# Altium PCB MUX_Connectivity.PcbDoc
Units mil, origin at the board's own origin, x right, y up, seen from the top; angles counter-clockwise.
Board outline 5000 x 10500 mil, 2 copper layers (Top Layer, Bottom Layer); 65 components, 230 nets, 646 pads, 0 vias.
Unrouted connection lines stored in the file: 390.
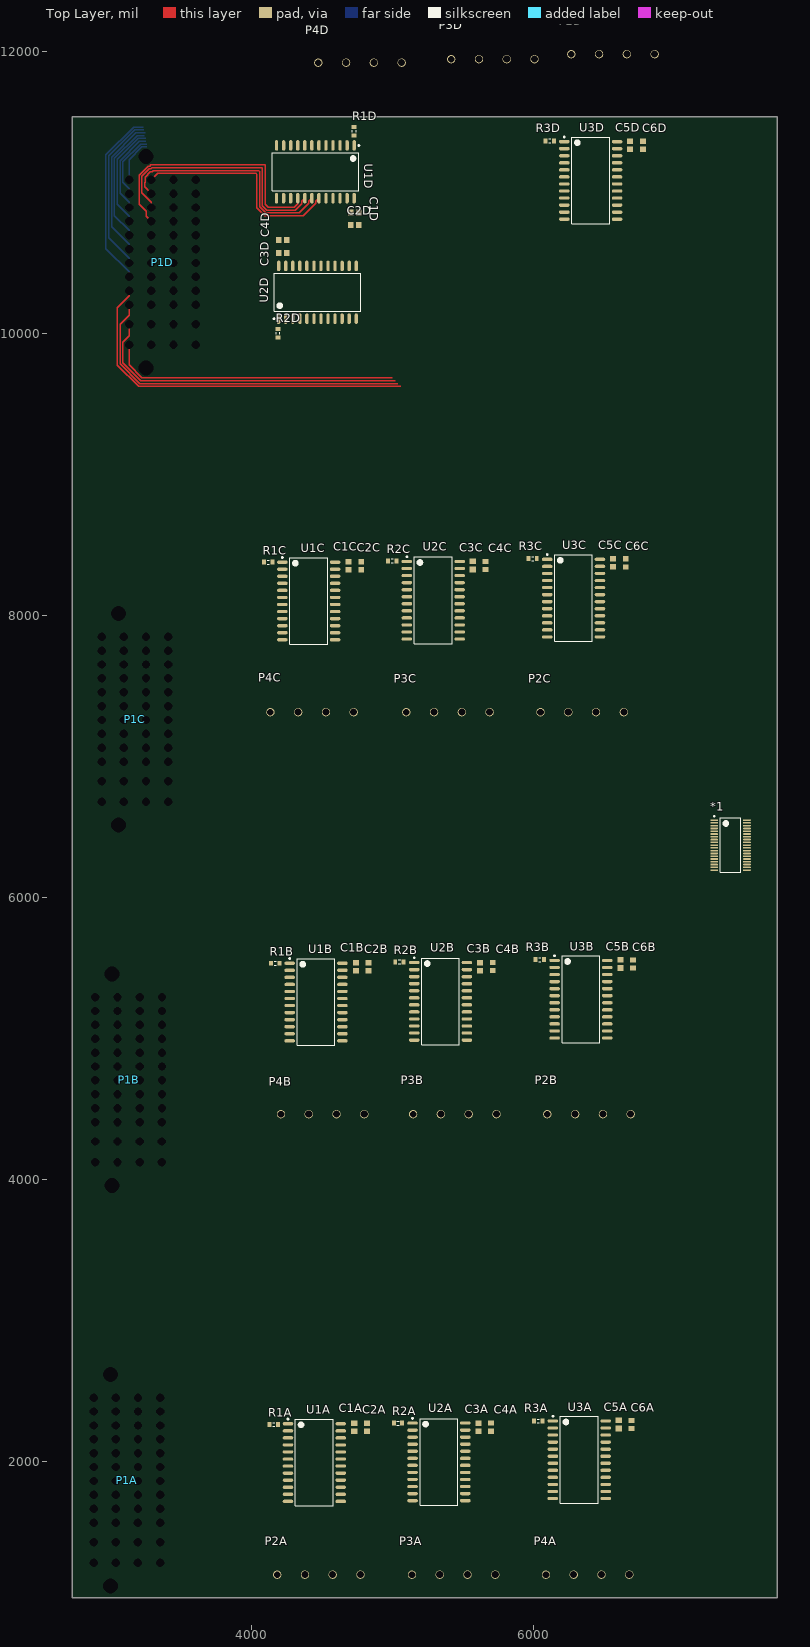
[diagram p0: Top Layer view]
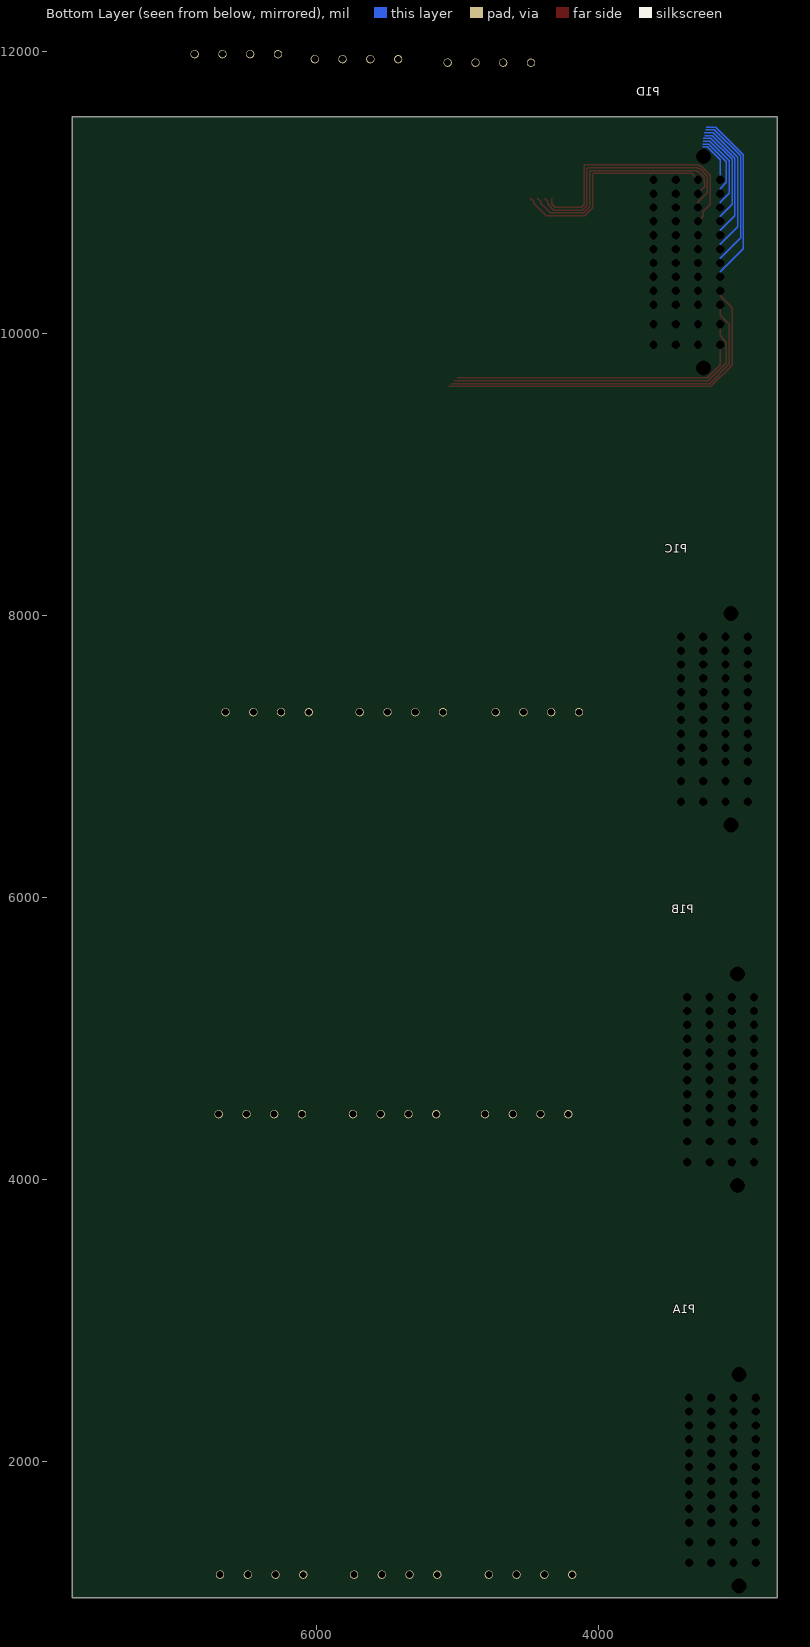
[diagram p1: Bottom Layer view, seen from below]

## Layer stack, top to bottom
Top Solder: solder mask 0.4, Solder Resist, Dk 3.5
Top Layer: signal copper 1.4
Dielectric 1: dielectric 12.6, FR-4, Dk 4.8
Bottom Layer: signal copper 1.4
Bottom Solder: solder mask 0.4, Solder Resist, Dk 3.5

## Board outline
2730,1035 2730,11535 7730,11535 7730,1035

## Design rules (kind name [scope] priority, off if disabled: settings)
Clearance [All] p1: gap=10 ignorepadtopadclearanceinfootprint=FALSE except(0: Arc-Hole Track-Hole SMDPad-Hole THPad-Hole Via-Hole Fill-Hole Poly-Hole Region-Hole Text-Hole)
ComponentClearance [All] p1: gap=10 collisioncheckmode=3 verticalgap=10 showdistances=TRUE
Height [All] p1: minheight=0 maxheight=7000 prefheight=500
PolygonConnect [All] p1: connectstyle=Relief reliefconductorwidth=10 reliefentries=4 polygonreliefangle="90 Angle" airgapwidth=10
RoomDefinition U_Single_Mux4 [InComponentClass('U_Single_Mux4')] p1: confinementstyle=ConfineIn formatcopy=TRUE lockcomponents=FALSE outline 4135.9,9895 7031.89,9895 7031.89,11505 4135.9,11505
RoomDefinition U_Single_Mux3 [InComponentClass('U_Single_Mux3')] p2: confinementstyle=ConfineIn formatcopy=TRUE lockcomponents=FALSE outline 4015,7103.54 6910.98,7103.54 6910.98,8458.54 4015,8458.54
RoomDefinition U_Single_Mux2 [InComponentClass('U_Single_Mux2')] p3: confinementstyle=ConfineIn formatcopy=TRUE lockcomponents=FALSE outline 4067.01,4260 6962.99,4260 6962.99,5615 4067.01,5615
RoomDefinition U_Single_Mux1 [InComponentClass('U_Single_Mux1')] p4: confinementstyle=ConfineIn formatcopy=TRUE lockcomponents=FALSE outline 4055,995 6950.98,995 6950.98,2350 4055,2350
RoomDefinition U_Data_Conversion [InComponentClass('U_Data_Conversion')] p5: confinementstyle=ConfineIn formatcopy=TRUE lockcomponents=FALSE outline 7180,6074.68 7660,6074.68 7660,6724.68 7180,6724.68
RoomDefinition U_AHK50H-ND_THERM_CONNECTOR4 [InComponentClass('U_AHK50H-ND_THERM_CONNECTOR4')] p6: confinementstyle=ConfineIn formatcopy=TRUE lockcomponents=FALSE outline 1449.88,11670.12 1449.88,9340.12 3774.88,9340.12 3774.88,11670.12
RoomDefinition U_AHK50H-ND_THERM_CONNECTOR3 [InComponentClass('U_AHK50H-ND_THERM_CONNECTOR3')] p7: confinementstyle=ConfineIn formatcopy=TRUE lockcomponents=FALSE outline 1215,8425 1215,6110 3540,6110 3540,8425
RoomDefinition U_AHK50H-ND_THERM_CONNECTOR2 [InComponentClass('U_AHK50H-ND_THERM_CONNECTOR2')] p8: confinementstyle=ConfineIn formatcopy=TRUE lockcomponents=FALSE outline 1210,5870 1210,3555 3535,3555 3535,5870
RoomDefinition U_AHK50H-ND_THERM_CONNECTOR1 [InComponentClass('U_AHK50H-ND_THERM_CONNECTOR1')] p9: confinementstyle=ConfineIn formatcopy=TRUE lockcomponents=FALSE outline 1195,3040 1195,675 3520,675 3520,3040
RoutingVias [All] p1: holewidth=28 width=50 viastyle="Through Hole" minholewidth=28 minwidth=50 maxholewidth=28 maxwidth=50
SolderMaskExpansion [All] p1: expansion=4
Width [All] p1: maxlimit=10 minlimit=10 preferedwidth=10
28 further rules are at their usual default settings.

## Classes and differential pairs
component class U_Data_Conversion: *1
channel class Single_Mux: U_Single_Mux1 U_Single_Mux2 U_Single_Mux3 U_Single_Mux4 U_Single_Mux5 U_Single_Mux6 U_Single_Mux7 U_Single_Mux8 U_Single_Mux9 U_Single_Mux10 U_Single_Mux11 U_Single_Mux12 U_Single_Mux13 U_Single_Mux14 U_Single_Mux15
component class U_Single_Mux4: C1D C2D C3D C4D C5D C6D P2D P3D P4D R1D R2D R3D U1D U2D U3D
component class U_Single_Mux3: C1C C2C C3C C4C C5C C6C P2C P3C P4C R1C R2C R3C U1C U2C U3C
component class U_Single_Mux2: C1B C2B C3B C4B C5B C6B P2B P3B P4B R1B R2B R3B U1B U2B U3B
component class U_Single_Mux1: C1A C2A C3A C4A C5A C6A P2A P3A P4A R1A R2A R3A U1A U2A U3A
component class U_AHK50H-ND_THERM_CONNECTOR1: P1A
component class U_AHK50H-ND_THERM_CONNECTOR2: P1B
component class U_AHK50H-ND_THERM_CONNECTOR3: P1C
channel class AHK50H-ND_THERM_CONNECTOR: U_AHK50H-ND_THERM_CONNECTOR1 U_AHK50H-ND_THERM_CONNECTOR2 U_AHK50H-ND_THERM_CONNECTOR3 U_AHK50H-ND_THERM_CONNECTOR4
channel class TOP_SHEET: top_Sheet1 top_Sheet2 top_Sheet3 top_Sheet4
net class ADC_OUTA[1..4]: ADC_OUTA1 ADC_OUTA2 ADC_OUTA3 ADC_OUTA4
net class ADC_OUTB[1..4]: ADC_OUTB1 ADC_OUTB2 ADC_OUTB3 ADC_OUTB4
net class ADC_OUTC[1..4]: ADC_OUTC1 ADC_OUTC2 ADC_OUTC3 ADC_OUTC4

## Components (designator, comment, footprint, x,y, rotation, side; value= is the part's Value field where it differs from the comment)
*1 "ADS7952SDBT" TSSOP50P640X120-38N 7398.86,6372.52 r0 top
C1A "0.1uF Cap" 0.1uF_Kemet 4730.98,2245 r90 top (schematic designator C1)
C1B "0.1uF Cap" 0.1uF_Kemet 4742.99,5510 r90 top (schematic designator C1)
C1C "0.1uF Cap" 0.1uF_Kemet 4690.98,8353.54 r90 top (schematic designator C1)
C1D "0.1uF Cap" 0.1uF_Kemet 4735.12,10858.11 r0 top (schematic designator C1)
C2A "1uF Samsung Cap" 1uf_Samsung 4820.98,2245 r90 top (schematic designator C2)
C2B "1uF Samsung Cap" 1uf_Samsung 4832.99,5510 r90 top (schematic designator C2)
C2C "1uF Samsung Cap" 1uf_Samsung 4780.98,8353.54 r90 top (schematic designator C2)
C2D "1uF Samsung Cap" 1uf_Samsung 4735.12,10768.11 r0 top (schematic designator C2)
C3A "0.1uF Cap" 0.1uF_Kemet 5610.98,2246.46 r90 top (schematic designator C3)
C3B "0.1uF Cap" 0.1uF_Kemet 5622.99,5511.46 r90 top (schematic designator C3)
C3C "0.1uF Cap" 0.1uF_Kemet 5570.98,8355 r90 top (schematic designator C3)
C3D "0.1uF Cap" 0.1uF_Kemet 4223.42,10571.89 r180 top (schematic designator C3)
C4A "1uF Samsung Cap" 1uf_Samsung 5700.98,2246.46 r90 top (schematic designator C4)
C4B "1uF Samsung Cap" 1uf_Samsung 5712.99,5511.46 r90 top (schematic designator C4)
C4C "1uF Samsung Cap" 1uf_Samsung 5660.98,8355 r90 top (schematic designator C4)
C4D "1uF Samsung Cap" 1uf_Samsung 4223.42,10661.89 r180 top (schematic designator C4)
C5A "0.1uF Cap" 0.1uF_Kemet 6605.98,2265 r90 top (schematic designator C5)
C5B "0.1uF Cap" 0.1uF_Kemet 6617.99,5530 r90 top (schematic designator C5)
C5C "0.1uF Cap" 0.1uF_Kemet 6565.98,8373.54 r90 top (schematic designator C5)
C5D "0.1uF Cap" 0.1uF_Kemet 6686.89,11335.12 r90 top (schematic designator C5)
C6A "1uF Samsung Cap" 1uf_Samsung 6695.98,2265 r90 top (schematic designator C6)
C6B "1uF Samsung Cap" 1uf_Samsung 6707.99,5530 r90 top (schematic designator C6)
C6C "1uF Samsung Cap" 1uf_Samsung 6655.98,8373.54 r90 top (schematic designator C6)
C6D "1uF Samsung Cap" 1uf_Samsung 6776.89,11335.12 r90 top (schematic designator C6)
P1A "Component_1" "MOLEX CMC 36638" 6026,1313 r270 top (schematic designator P1)
P1B "Component_1" "MOLEX CMC 36638" 6038.12,4152.88 r270 top (schematic designator P1)
P1C "Component_1" "MOLEX CMC 36638" 6083.12,6707.88 r270 top (schematic designator P1)
P1D "Component_1" "MOLEX CMC 36638" 6278,9948 r270 top (schematic designator P1)
P2A "Molex_4Pin" MUX_SEL_CON 4184.45,1200 r0 top (schematic designator P2)
P2B "Molex_4Pin" MUX_SEL_CON 6100,4465 r0 top (schematic designator P2)
P2C "Molex_4Pin" MUX_SEL_CON 6051.3,7315 r0 top (schematic designator P2)
P2D "Molex_4Pin" MUX_SEL_CON 6270,11980 r0 top (schematic designator P2)
P3A "Molex_4Pin" MUX_SEL_CON 5140,1200 r0 top (schematic designator P3)
P3B "Molex_4Pin" MUX_SEL_CON 5148.15,4465 r0 top (schematic designator P3)
P3C "Molex_4Pin" MUX_SEL_CON 5100,7315 r0 top (schematic designator P3)
P3D "Molex_4Pin" MUX_SEL_CON 5418.15,11945 r0 top (schematic designator P3)
P4A "Molex_4Pin" MUX_SEL_CON 6090,1200 r0 top (schematic designator P4)
P4B "Molex_4Pin" MUX_SEL_CON 4211.3,4465 r0 top (schematic designator P4)
P4C "Molex_4Pin" MUX_SEL_CON 4136.3,7315 r0 top (schematic designator P4)
P4D "Molex_4Pin" MUX_SEL_CON 4476.3,11920 r0 top (schematic designator P4)
R1A "Res3" J1-0603 4160.51,2265 r180 top value=1K (schematic designator R1)
R1B "Res3" J1-0603 4170.47,5535 r180 top value=1K (schematic designator R1)
R1C "Res3" J1-0603 4120.51,8378.54 r180 top value=1K (schematic designator R1)
R1D "Res3" J1-0603 4730.12,11433.58 r90 top value=1K (schematic designator R1)
R2A "Res3" J1-0603 5040.98,2275 r180 top value=1K (schematic designator R2)
R2B "Res3" J1-0603 5050.94,5545 r180 top value=1K (schematic designator R2)
R2C "Res3" J1-0603 5000.98,8388.54 r180 top value=1K (schematic designator R2)
R2D "Res3" J1-0603 4189.88,10001.89 r270 top value=1K (schematic designator R2)
R3A "Res3" J1-0603 6035.51,2290 r180 top value=1K (schematic designator R3)
R3B "Res3" J1-0603 6045.47,5560 r180 top value=1K (schematic designator R3)
R3C "Res3" J1-0603 5995.51,8403.54 r180 top value=1K (schematic designator R3)
R3D "Res3" J1-0603 6116.42,11365.12 r180 top value=1K (schematic designator R3)
U1A "CD74HC4067SM96" SOIC-24_MUX 4447.99,1995 r0 top (schematic designator U1)
U1B "CD74HC4067SM96" SOIC-24_MUX 4460,5260 r0 top (schematic designator U1)
U1C "CD74HC4067SM96" SOIC-24_MUX 4407.99,8103.54 r0 top (schematic designator U1)
U1D "CD74HC4067SM96" SOIC-24_MUX 4455.12,11146.1 r270 top (schematic designator U1)
U2A "CD74HC4067SM96" SOIC-24_MUX 5330.98,2000 r0 top (schematic designator U2)
U2B "CD74HC4067SM96" SOIC-24_MUX 5342.99,5265 r0 top (schematic designator U2)
U2C "CD74HC4067SM96" SOIC-24_MUX 5290.98,8108.54 r0 top (schematic designator U2)
U2D "CD74HC4067SM96" SOIC-24_MUX 4469.88,10291.89 r90 top (schematic designator U2)
U3A "CD74HC4067SM96" SOIC-24_MUX 6325.98,2015 r0 top (schematic designator U3)
U3B "CD74HC4067SM96" SOIC-24_MUX 6337.99,5280 r0 top (schematic designator U3)
U3C "CD74HC4067SM96" SOIC-24_MUX 6285.98,8123.54 r0 top (schematic designator U3)
U3D "CD74HC4067SM96" SOIC-24_MUX 6406.89,11085.12 r0 top (schematic designator U3)

## Footprints (in the part's own frame and the unit in brackets; to place one, negate y for a bottom-side part, rotate by r counter-clockwise, add the part's x,y. Pads: shape width x height; smd on the part's side, far side on the other; paste and mask are expansions set on the pad)
0.1uF_Kemet [mm] "Chip Capacitor, 2-Leads, Body 1.60x0.80mm, IPC Low Density"
  rect 1x1.1 smd: 1(-0.725,0) 2(0.725,0)
  body extent -0.87,-0.48 0.87,0.48, height 0.92
1uf_Samsung [mm] "Chip Capacitor, 2-Leads, Body 1.60x0.80mm, IPC Low Density"
  rect 0.95x1.05 smd: 1(-0.725,0) 2(0.725,0)
  body extent -0.85,-0.45 0.85,0.45, height 0.9
J1-0603 [mm] "Chip Resistor, Body 1.6x0.8mm, IPC High Density"
  rect 0.7x0.9 smd: 1(-0.75,0) 2(0.75,0)
  silkscreen extent -0.2,-0.35 0.2,0.35, body extent -0.85,-0.48 0.85,0.48, height 0.9
"MOLEX CMC 36638" [mm] "48 Pin Connector"
  round 0 hole 1.5: 1(-29.01,-79.835) 2(-26.51,-79.835) 3(-24.01,-79.835) 4(-21.51,-79.835) 5(-19.01,-79.835) 6(-16.51,-79.835) 7(-14.01,-79.835) 8(-11.51,-79.835) 9(-9.01,-79.835) 10(-6.502,-79.832) 11(-2.997,-79.832) 12(0.711,-79.832) 13(-29.01,-75.835) 14(-26.51,-75.835) 15(-24.01,-75.835) 16(-21.51,-75.835) 17(-19.01,-75.835) 18(-16.51,-75.835) 19(-14.01,-75.835) 20(-11.51,-75.835) 21(-9.01,-75.835) 22(-6.502,-75.844) 23(-2.997,-75.844) 24(0.711,-75.844) 25(-29.01,-71.835) 26(-26.51,-71.835) 27(-24.01,-71.835) 28(-21.51,-71.835) 29(-19.01,-71.835) 30(-16.51,-71.835) 31(-14.01,-71.835) 32(-11.51,-71.835) 33(-9.01,-71.835) 34(-6.502,-71.857) 35(-2.997,-71.857) 36(0.711,-71.857) 37(-29.01,-67.835) 38(-26.51,-67.835) 39(-24.01,-67.835) 40(-21.51,-67.835) 41(-19.01,-67.835) 42(-16.51,-67.835) 43(-14.01,-67.835) 44(-11.51,-67.835) 45(-9.01,-67.835) 46(-6.502,-67.843) 47(-2.997,-67.843) 48(0.711,-67.843)
  round 0 hole 2.7: 49(4.902,-76.835) 50(-33.198,-76.835)
  body extent -43.4,-121.12 15.1,-64.9, height 29.35
MUX_SEL_CON [mm]
  round 1.5 hole 1.2: 1(0,0)
  round 1.5 hole 1.27: 2(5,0) 3(10,0) 4(15,0)
  body extent -2.5,-4.83 17.49,4.57, height 15.63
SOIC-24_MUX [mm] "SOIC, 24-Leads, Body 15.40x7.50mm, Pitch 1.27mm, IPC Medium Density"
  oval 1.9x0.6 smd: 1(-4.75,6.985) 2(-4.75,5.715) 3(-4.75,4.445) 4(-4.75,3.175) 5(-4.75,1.905) 6(-4.75,0.635) 7(-4.75,-0.635) 8(-4.75,-1.905) 9(-4.75,-3.175) 10(-4.75,-4.445) 11(-4.75,-5.715) 12(-4.75,-6.985) 13(4.75,-6.985) 14(4.75,-5.715) 15(4.75,-4.445) 16(4.75,-3.175) 17(4.75,-1.905) 18(4.75,-0.635) 19(4.75,0.635) 20(4.75,1.905) 21(4.75,3.175) 22(4.75,4.445) 23(4.75,5.715) 24(4.75,6.985)
  silkscreen extent -4.87,-7.8 3.4,7.96, body extent -5.15,-7.8 5.15,7.8, height 2.65
TSSOP50P640X120-38N [mm] "TSSOP, 38-Leads, Body 9.70x4.40mm, Pitch 0.50mm, IPC Medium Density"
  oval 1.4x0.3 smd: 1(-2.95,4.5) 2(-2.95,4) 3(-2.95,3.5) 4(-2.95,3) 5(-2.95,2.5) 6(-2.95,2) 7(-2.95,1.5) 8(-2.95,1) 9(-2.95,0.5) 10(-2.95,0) 11(-2.95,-0.5) 12(-2.95,-1) 13(-2.95,-1.5) 14(-2.95,-2) 15(-2.95,-2.5) 16(-2.95,-3) 17(-2.95,-3.5) 18(-2.95,-4) 19(-2.95,-4.5) 20(2.95,-4.5) 21(2.95,-4) 22(2.95,-3.5) 23(2.95,-3) 24(2.95,-2.5) 25(2.95,-2) 26(2.95,-1.5) 27(2.95,-1) 28(2.95,-0.5) 29(2.95,0) 30(2.95,0.5) 31(2.95,1) 32(2.95,1.5) 33(2.95,2) 34(2.95,2.5) 35(2.95,3) 36(2.95,3.5) 37(2.95,4) 38(2.95,4.5)
  silkscreen extent -3.07,-4.9 1.85,5.32, body extent -3.2,-4.9 3.2,4.9, height 1.2

## Part data
*1: Supplier Part Number 1=296-23503-5-ND, Supplier 1=Digi-Key
C1A C1B C1C C1D C3A C3B C3C C3D C5A C5B C5C C5D: "C0603C101K8GAC7867 Kemet Capacitor", Supplier Part Number 1=399-14477-1-ND, Supplier 1=Digi-Key
C2A C2B C2C C2D C4A C4B C4C C4D C6A C6B C6C C6D: Supplier Part Number 1=1276-1946-1-ND, Supplier 1=Digi-Key
P1A P1B P1C P1D: "CONN CMC HEADER 48POS R/A BROWN", Supplier Part Number 1=WM13375-ND, Supplier 1=Digi-Key
P2A P2B P2C P2D P3A P3B P3C P3D P4A P4B P4C P4D: library part Component_1, Supplier Part Number 1=WM13967-ND, Supplier 1=Digi-Key
R1A R1B R1C R1D R2A R2B R2C R2D R3A R3B R3C R3D: "Resistor", LatestRevisionDate=29-May-2009, LatestRevisionNote="IPC-7351 Footprint Added.", PackageDescription="Chip Resistor", PackageReference=J1-0603, Published=8-Jun-2000, Publisher="Altium Limited"
U1A U1B U1C U1D U2A U2B U2C U2D U3A U3B U3C U3D: Supplier Part Number 1=05B6161, Supplier 1=Newark

## Nets (pads, with @x,y where several pads share a name; then routed paths per layer and width w, separated by ;. In a path a pad name is that pad's centre, name@x,y a point inside that pad or via, vN(x,y) a via of type N, cw(c..) or ccw(c..) an arc to the next point about the centre after c; other vN are vias at no path point)
5V: C1A.2 C1B.2 C1C.2 C1D.2 C2A.2 C2B.2 C2C.2 C2D.2 C3A.2 C3B.2 C3C.2 C3D.2 C4A.2 C4B.2 C4C.2 C4D.2 C5A.2 C5B.2 C5C.2 C5D.2 C6A.2 C6B.2 C6C.2 C6D.2 R1A.1 R1B.1 R1C.1 R1D.1 R2A.1 R2B.1 R2C.1 R2D.1 R3A.1 R3B.1 R3C.1 R3D.1 U1A.24 U1B.24 U1C.24 U1D.24 U2A.24 U2B.24 U2C.24 U2D.24 U3A.24 U3B.24 U3C.24 U3D.24
5VAN: *1.29
5VDIG: *1.36
ADC_OUTA1: *1.28 R1A.2 U1A.1
ADC_OUTA2: *1.25 R1B.2 U1B.1
ADC_OUTA3: *1.22 R1C.2 U1C.1
ADC_OUTA4: *1.17 R1D.2 U1D.1
ADC_OUTB1: *1.27 R2A.2 U2A.1
ADC_OUTB2: *1.24 R2B.2 U2B.1
ADC_OUTB3: *1.21 R2C.2 U2C.1
ADC_OUTB4: *1.16 R2D.2 U2D.1
ADC_OUTC1: *1.26 R3A.2 U3A.1
ADC_OUTC2: *1.23 R3B.2 U3B.1
ADC_OUTC3: *1.18 R3C.2 U3C.1
ADC_OUTC4: *1.15 R3D.2 U3D.1
AGND: *1.3 *1.6 *1.19 *1.20 *1.30
C\S\_4: *1.31
DGND: *1.35
GND: C1A.1 C1B.1 C1C.1 C1D.1 C2A.1 C2B.1 C2C.1 C2D.1 C3A.1 C3B.1 C3C.1 C3D.1 C4A.1 C4B.1 C4C.1 C4D.1 C5A.1 C5B.1 C5C.1 C5D.1 C6A.1 C6B.1 C6C.1 C6D.1 U1A.12 U1A.15 U1B.12 U1B.15 U1C.12 U1C.15 U1D.12 U1D.15 U2A.12 U2A.15 U2B.12 U2B.15 U2C.12 U2C.15 U2D.12 U2D.15 U3A.12 U3A.15 U3B.12 U3B.15 U3C.12 U3C.15 U3D.12 U3D.15
S0A: P2A.1 P3A.1 P4A.1 U1A.10 U2A.10 U3A.10
S0B: P2B.1 P3B.1 P4B.1 U1B.10 U2B.10 U3B.10
S0C: P2C.1 P3C.1 P4C.1 U1C.10 U2C.10 U3C.10
S0D: P2D.1 P3D.1 P4D.1 U1D.10 U2D.10 U3D.10
S1A: P2A.2 P3A.2 P4A.2 U1A.11 U2A.11 U3A.11
S1B: P2B.2 P3B.2 P4B.2 U1B.11 U2B.11 U3B.11
S1C: P2C.2 P3C.2 P4C.2 U1C.11 U2C.11 U3C.11
S1D: P2D.2 P3D.2 P4D.2 U1D.11 U2D.11 U3D.11
S2A: P2A.3 P3A.3 P4A.3 U1A.14 U2A.14 U3A.14
S2B: P2B.3 P3B.3 P4B.3 U1B.14 U2B.14 U3B.14
S2C: P2C.3 P3C.3 P4C.3 U1C.14 U2C.14 U3C.14
S2D: P2D.3 P3D.3 P4D.3 U1D.14 U2D.14 U3D.14
S3A: P2A.4 P3A.4 P4A.4 U1A.13 U2A.13 U3A.13
S3B: P2B.4 P3B.4 P4B.4 U1B.13 U2B.13 U3B.13
S3C: P2C.4 P3C.4 P4C.4 U1C.13 U2C.13 U3C.13
S3D: P2D.4 P3D.4 P4D.4 U1D.13 U2D.13 U3D.13
SCLK_4: *1.32
SDI_4: *1.33
SDO_4: *1.34
TS_IN1A: P1A.1 U1A.9
TS_IN1B: P1B.1 U1B.9
TS_IN1C: P1C.1 U1C.9
TS_IN1D: P1D.1 U1D.9 | length 305.5
  Bottom Layer w10: P1D.1 3134.88,11233.26 3224.77,11323.15 3260,11323.15
TS_IN2A: P1A.2 U1A.8
TS_IN2B: P1B.2 U1B.8
TS_IN2C: P1C.2 U1C.8
TS_IN2D: P1D.2 U1D.8 | length 465.7
  Bottom Layer w10: P1D.2 3134.88,11027.15 3090.35,11071.68 3090.35,11217.01 3216.49,11343.15 3260,11343.15
TS_IN3A: P1A.3 U1A.7
TS_IN3B: P1B.3 U1B.7
TS_IN3C: P1C.3 U1C.7
TS_IN3D: P1D.3 U1D.7 | length 598.7
  Bottom Layer w10: P1D.3 3134.88,10928.72 3070.35,10993.25 3070.35,11225.3 3208.2,11363.15 3253.15,11363.15
TS_IN4A: P1A.4 U1A.6
TS_IN4B: P1B.4 U1B.6
TS_IN4C: P1C.4 U1C.6
TS_IN4D: P1D.4 U1D.6 | length 738.5
  Bottom Layer w10: P1D.4 3134.88,10830.3 3050.35,10914.83 3050.35,11233.58 3199.92,11383.15 3253.15,11383.15
TS_IN5A: P1A.5 U1A.5
TS_IN5B: P1B.5 U1B.5
TS_IN5C: P1C.5 U1C.5
TS_IN5D: P1D.5 U1D.5 | length 868.3
  Bottom Layer w10: P1D.5 3134.88,10731.87 3030.35,10836.4 3030.35,11241.87 3191.63,11403.15 3243.15,11403.15
TS_IN6A: P1A.6 U1A.4
TS_IN6B: P1B.6 U1B.4
TS_IN6C: P1C.6 U1C.4
TS_IN6D: P1D.6 U1D.4 | length 1013.2
  Bottom Layer w10: P1D.6 3134.88,10633.45 3010.35,10757.98 3010.35,11250.15 3183.35,11423.15 3248.15,11423.15
TS_IN7A: P1A.7 U1A.3
TS_IN7B: P1B.7 U1B.3
TS_IN7C: P1C.7 U1C.3
TS_IN7D: P1D.7 U1D.3 | length 1143
  Bottom Layer w10: P1D.7 3134.88,10535.02 2990.35,10679.55 2990.35,11258.44 3175.07,11443.15 3238.15,11443.15
TS_IN8A: P1A.8 U1A.2
TS_IN8B: P1B.8 U1B.2
TS_IN8C: P1C.8 U1C.2
TS_IN8D: P1D.8 U1D.2 | length 1277.9
  Bottom Layer w10: P1D.8 3134.88,10436.6 2970.35,10601.12 2970.35,11266.72 3166.78,11463.15 3233.15,11463.15
TS_IN9A: P1A.9 U1A.23
TS_IN9B: P1B.9 U1B.23
TS_IN9C: P1C.9 U1C.23
TS_IN9D: P1D.9 U1D.23 | length 2633.6
  Top Layer w10: P1D.9 3134.88,10266.85 3050.47,10182.44 3050.47,9776.3 3201.77,9625 5060,9625
TS_IN10A: P1A.10 U1A.22
TS_IN10B: P1B.10 U1B.22
TS_IN10C: P1C.10 U1C.22
TS_IN10D: P1D.10 U1D.22 | length 2473.5
  Top Layer w10: P1D.10 3135,10128.97 3070.47,10064.44 3070.47,9784.58 3210.05,9645 5040,9645
TS_IN11A: P1A.11 U1A.21
TS_IN11B: P1B.11 U1B.21
TS_IN11C: P1C.11 U1C.21
TS_IN11D: P1D.11 U1D.21 | length 2274.1
  Top Layer w10: P1D.11 3135,9982.97 3090.47,9938.44 3090.47,9792.87 3218.34,9665 5020,9665
TS_IN12A: P1A.12 U1A.20
TS_IN12B: P1B.12 U1B.20
TS_IN12C: P1C.12 U1C.20
TS_IN12D: P1D.12 U1D.20 | length 2050
  Top Layer w10: P1D.12 3135,9776.62 3224.77,9686.85 3281.23,9686.85 3279.38,9685 5000,9685
TS_IN13A: P1A.13 U1A.19
TS_IN13B: P1B.13 U1B.19
TS_IN13C: P1C.13 U1C.19
TS_IN13D: P1D.13 U1D.19 | length 1554.7
  Top Layer w10: 3316.89,11090.12 P1D.13 3336.89,11134.65 4035.35,11134.65 4039.65,11130.35 4039.65,10890.5 4095.15,10835 4369.53,10835 4456.93,10922.4 4456.93,10935.91 U1D.19
TS_IN14A: P1A.14 U1A.18
TS_IN14B: P1B.14 U1B.18
TS_IN14C: P1C.14 U1C.18
TS_IN14D: P1D.14 U1D.18 | length 1661.3
  Top Layer w10: P1D.14 3245,11039.05 3245,11070 3247.83,11072.83 3247.83,11108.56 3286.12,11146.85 3297.8,11146.85 3305.59,11154.65 4055,11154.65 4059.65,11150 4059.65,10898.78 4103.43,10855 4339.53,10855 4406.93,10922.4 4406.93,10935.91 U1D.18
TS_IN15A: P1A.15 U1A.17
TS_IN15B: P1B.15 U1B.17
TS_IN15C: P1C.15 U1C.17
TS_IN15D: P1D.15 U1D.17 | length 1752
  Top Layer w10: P1D.15 3292.36,10928.72 3225,10996.08 3225,11114.02 3277.83,11166.85 3289.51,11166.85 3297.31,11174.65 4075,11174.65 4079.65,11170 4079.65,10907.07 4111.72,10875 4313.28,10875 4356.93,10918.65 4356.93,10935.91 U1D.17
TS_IN16A: P1A.16 U1A.16
TS_IN16B: P1B.16 U1B.16
TS_IN16C: P1C.16 U1C.16
TS_IN16D: P1D.16 U1D.16 | length 1855.8
  Top Layer w10: P1D.16 3256.1,10831.1 3256.1,10866.56 3205,10917.66 3205,11122.3 3269.55,11186.85 3281.23,11186.85 3289.03,11194.65 4099.65,11194.65 4099.65,10915.35 4120,10895 4305,10895 4330.12,10920.12 U1D.16
TS_IN17A: P1A.17 U2A.9
TS_IN17B: P1B.17 U2B.9
TS_IN17C: P1C.17 U2C.9
TS_IN17D: P1D.17 U2D.9
TS_IN18A: P1A.18 U2A.8
TS_IN18B: P1B.18 U2B.8
TS_IN18C: P1C.18 U2C.8
TS_IN18D: P1D.18 U2D.8
TS_IN19A: P1A.19 U2A.7
TS_IN19B: P1B.19 U2B.7
TS_IN19C: P1C.19 U2C.7
TS_IN19D: P1D.19 U2D.7
TS_IN20A: P1A.20 U2A.6
TS_IN20B: P1B.20 U2B.6
TS_IN20C: P1C.20 U2C.6
TS_IN20D: P1D.20 U2D.6
TS_IN21A: P1A.21 U2A.5
TS_IN21B: P1B.21 U2B.5
TS_IN21C: P1C.21 U2C.5
TS_IN21D: P1D.21 U2D.5
TS_IN22A: P1A.22 U2A.4
TS_IN22B: P1B.22 U2B.4
TS_IN22C: P1C.22 U2C.4
TS_IN22D: P1D.22 U2D.4
TS_IN23A: P1A.23 U2A.3
TS_IN23B: P1B.23 U2B.3
TS_IN23C: P1C.23 U2C.3
TS_IN23D: P1D.23 U2D.3
TS_IN24A: P1A.24 U2A.2
TS_IN24B: P1B.24 U2B.2
TS_IN24C: P1C.24 U2C.2
TS_IN24D: P1D.24 U2D.2
TS_IN25A: P1A.25 U2A.23
TS_IN25B: P1B.25 U2B.23
TS_IN25C: P1C.25 U2C.23
TS_IN25D: P1D.25 U2D.23
TS_IN26A: P1A.26 U2A.22
TS_IN26B: P1B.26 U2B.22
TS_IN26C: P1C.26 U2C.22
TS_IN26D: P1D.26 U2D.22
TS_IN27A: P1A.27 U2A.21
TS_IN27B: P1B.27 U2B.21
TS_IN27C: P1C.27 U2C.21
TS_IN27D: P1D.27 U2D.21 | length 6.6
  Top Layer w10: P1D.27 3449.84,10899.84
TS_IN28A: P1A.28 U2A.20
TS_IN28B: P1B.28 U2B.20
TS_IN28C: P1C.28 U2C.20
TS_IN28D: P1D.28 U2D.20
TS_IN29A: P1A.29 U2A.19
TS_IN29B: P1B.29 U2B.19
TS_IN29C: P1C.29 U2C.19
TS_IN29D: P1D.29 U2D.19
TS_IN30A: P1A.30 U2A.18
TS_IN30B: P1B.30 U2B.18
TS_IN30C: P1C.30 U2C.18
TS_IN30D: P1D.30 U2D.18
TS_IN31A: P1A.31 U2A.17
TS_IN31B: P1B.31 U2B.17
TS_IN31C: P1C.31 U2C.17
TS_IN31D: P1D.31 U2D.17
TS_IN32A: P1A.32 U2A.16
TS_IN32B: P1B.32 U2B.16
TS_IN32C: P1C.32 U2C.16
TS_IN32D: P1D.32 U2D.16
TS_IN33A: P1A.33 U3A.9
TS_IN33B: P1B.33 U3B.9
TS_IN33C: P1C.33 U3C.9
TS_IN33D: P1D.33 U3D.9
TS_IN34A: P1A.34 U3A.8
TS_IN34B: P1B.34 U3B.8
TS_IN34C: P1C.34 U3C.8
TS_IN34D: P1D.34 U3D.8
TS_IN35A: P1A.35 U3A.7
TS_IN35B: P1B.35 U3B.7
TS_IN35C: P1C.35 U3C.7
TS_IN35D: P1D.35 U3D.7
TS_IN36A: P1A.36 U3A.6
TS_IN36B: P1B.36 U3B.6
TS_IN36C: P1C.36 U3C.6
TS_IN36D: P1D.36 U3D.6
TS_IN37A: P1A.37 U3A.5
TS_IN37B: P1B.37 U3B.5
TS_IN37C: P1C.37 U3C.5
TS_IN37D: P1D.37 U3D.5
TS_IN38A: P1A.38 U3A.4
TS_IN38B: P1B.38 U3B.4
TS_IN38C: P1C.38 U3C.4
TS_IN38D: P1D.38 U3D.4
TS_IN39A: P1A.39 U3A.3
TS_IN39B: P1B.39 U3B.3
TS_IN39C: P1C.39 U3C.3
TS_IN39D: P1D.39 U3D.3
TS_IN40A: P1A.40 U3A.2
TS_IN40B: P1B.40 U3B.2
TS_IN40C: P1C.40 U3C.2
TS_IN40D: P1D.40 U3D.2
TS_IN41A: P1A.41 U3A.23
TS_IN41B: P1B.41 U3B.23
TS_IN41C: P1C.41 U3C.23
TS_IN41D: P1D.41 U3D.23
TS_IN42A: P1A.42 U3A.22
TS_IN42B: P1B.42 U3B.22
TS_IN42C: P1C.42 U3C.22
TS_IN42D: P1D.42 U3D.22
TS_IN43A: P1A.43 U3A.21
TS_IN43B: P1B.43 U3B.21
TS_IN43C: P1C.43 U3C.21
TS_IN43D: P1D.43 U3D.21
TS_IN44A: P1A.44 U3A.20
TS_IN44B: P1B.44 U3B.20
TS_IN44C: P1C.44 U3C.20
TS_IN44D: P1D.44 U3D.20
TS_IN45A: P1A.45 U3A.19
TS_IN45B: P1B.45 U3B.19
TS_IN45C: P1C.45 U3C.19
TS_IN45D: P1D.45 U3D.19
TS_IN46A: P1A.46 U3A.18
TS_IN46B: P1B.46 U3B.18
TS_IN46C: P1C.46 U3C.18
TS_IN46D: P1D.46 U3D.18
TS_IN47A: P1A.47 U3A.17
TS_IN47B: P1B.47 U3B.17
TS_IN47C: P1C.47 U3C.17
TS_IN47D: P1D.47 U3D.17
TS_IN48A: P1A.48 U3A.16
TS_IN48B: P1B.48 U3B.16
TS_IN48C: P1C.48 U3C.16
TS_IN48D: P1D.48 U3D.16
pads on no net: *1.1 *1.2 *1.4 *1.5 *1.7 *1.8 *1.9 *1.10 *1.11 *1.12 *1.13 *1.14 *1.37 *1.38 P1A.49 P1A.50 P1B.49 P1B.50 P1C.49 P1C.50 P1D.49 P1D.50